# Altium PCB PCB1.PcbDoc
Units mil, origin at the board's own origin, x right, y up, seen from the top; angles counter-clockwise.
Board outline 1693.54 x 1695 mil, 2 copper layers (Top Layer, Bottom Layer); 27 components, 14 nets, 80 pads, 14 vias.
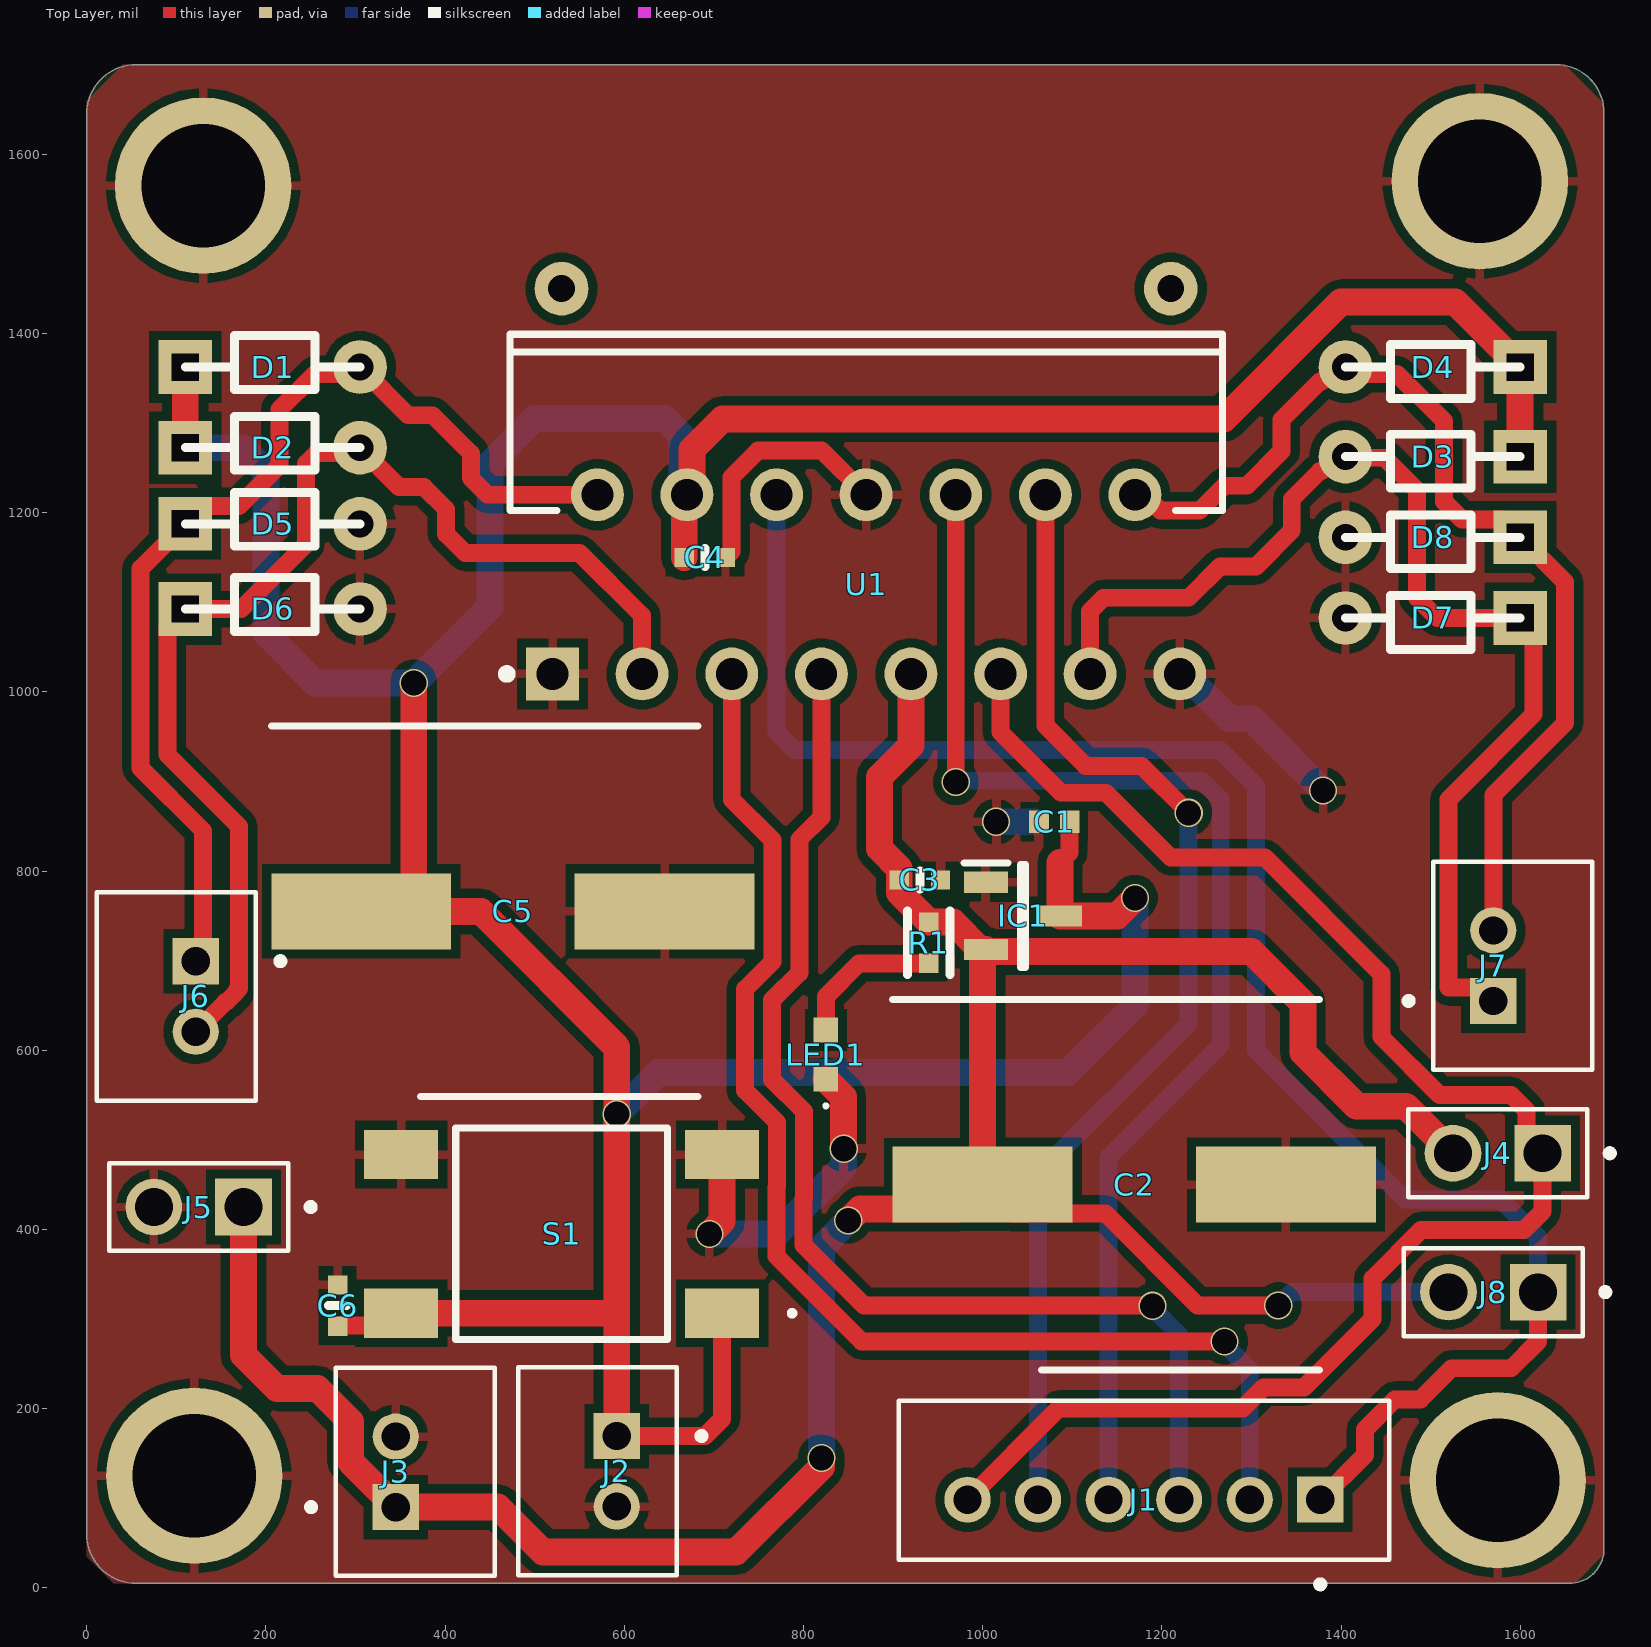
[diagram p0: Top Layer view]
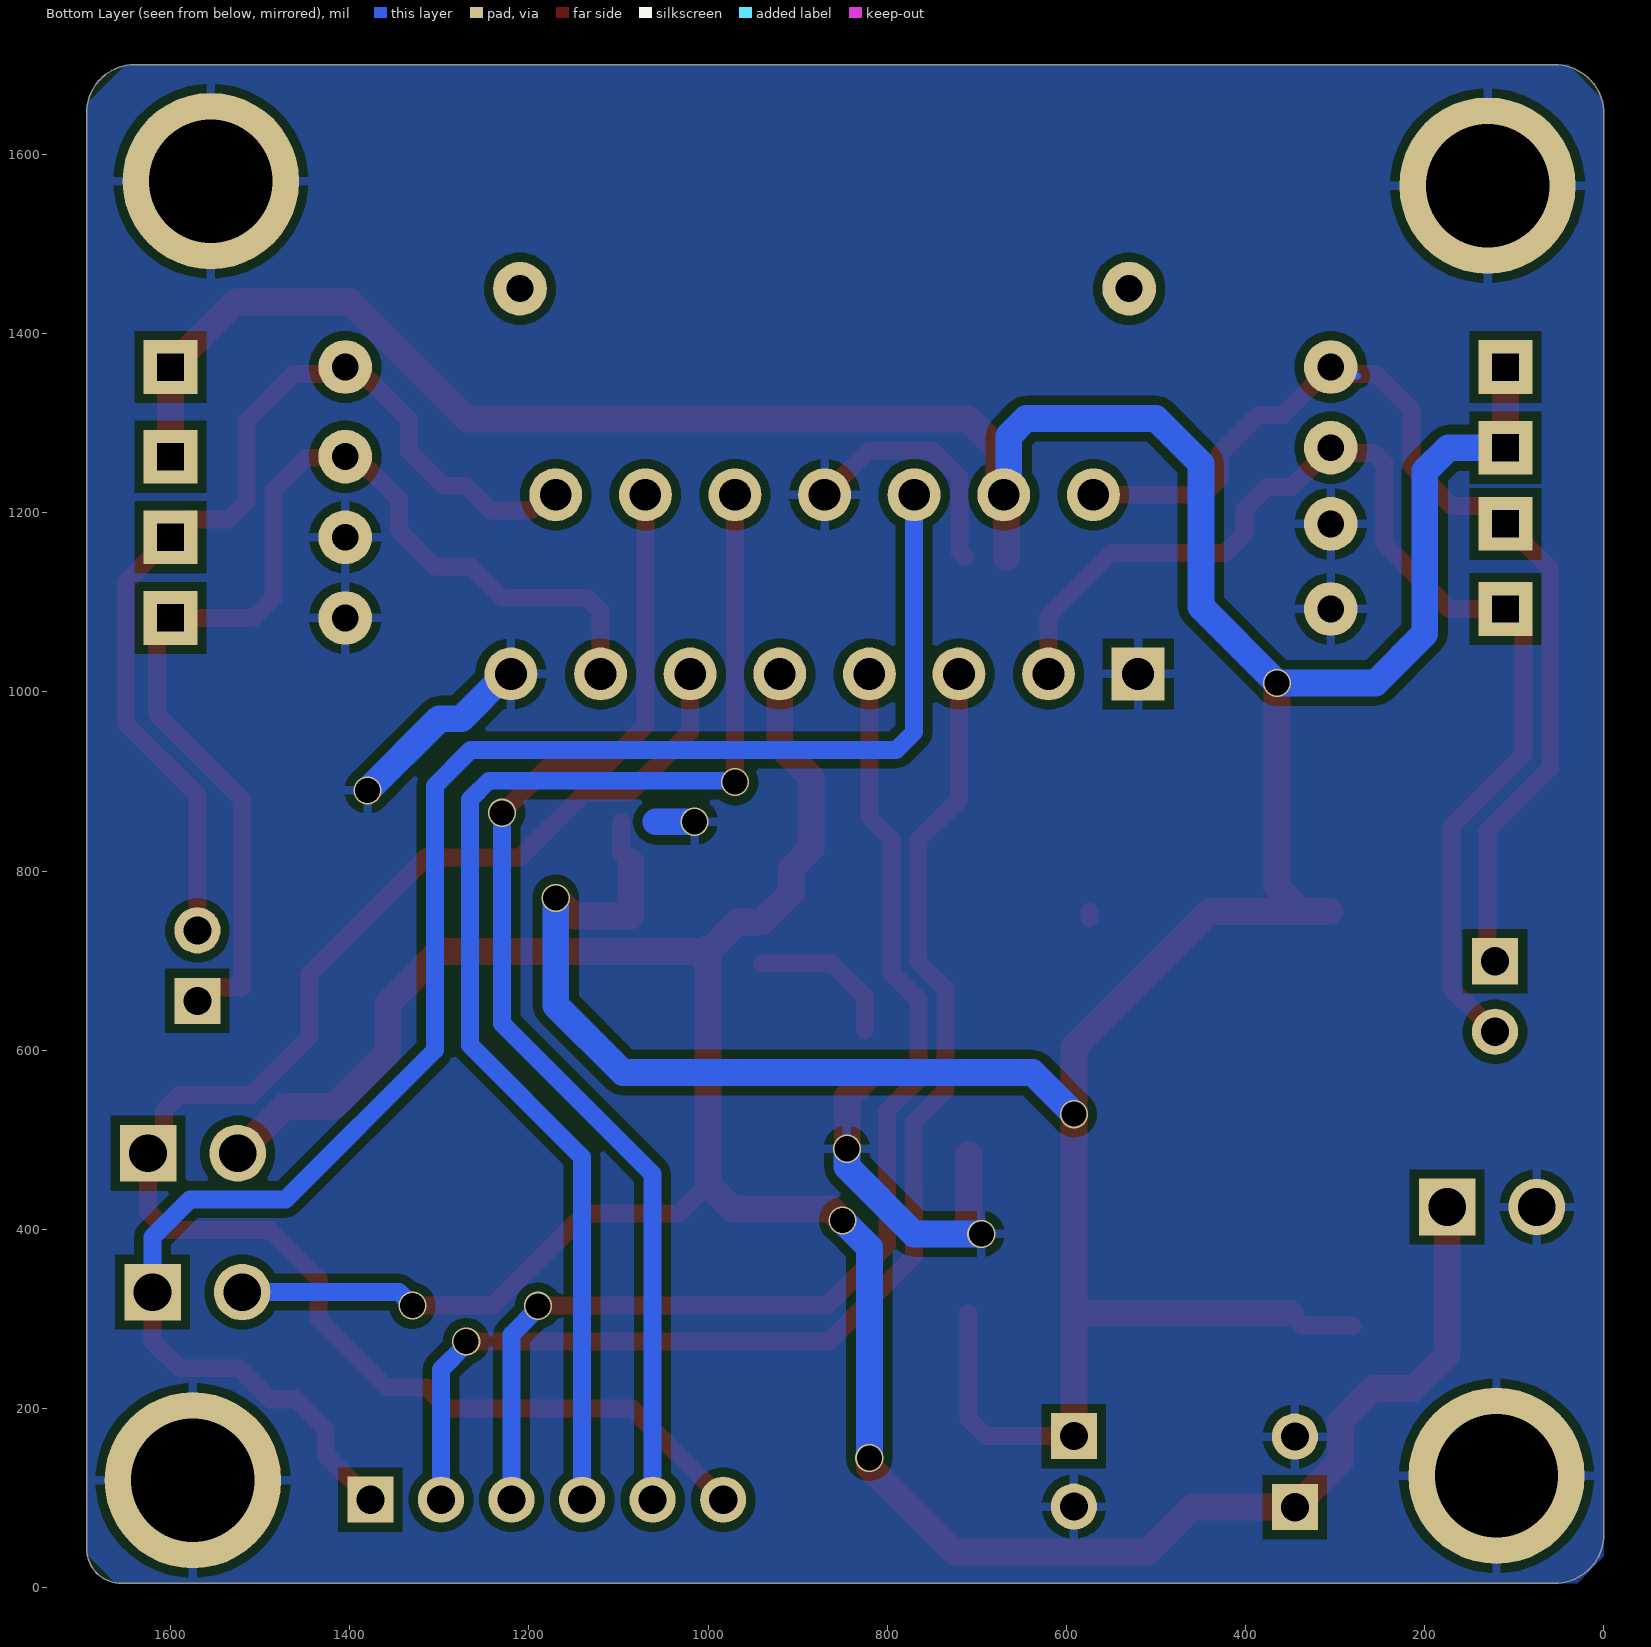
[diagram p1: Bottom Layer view, seen from below]
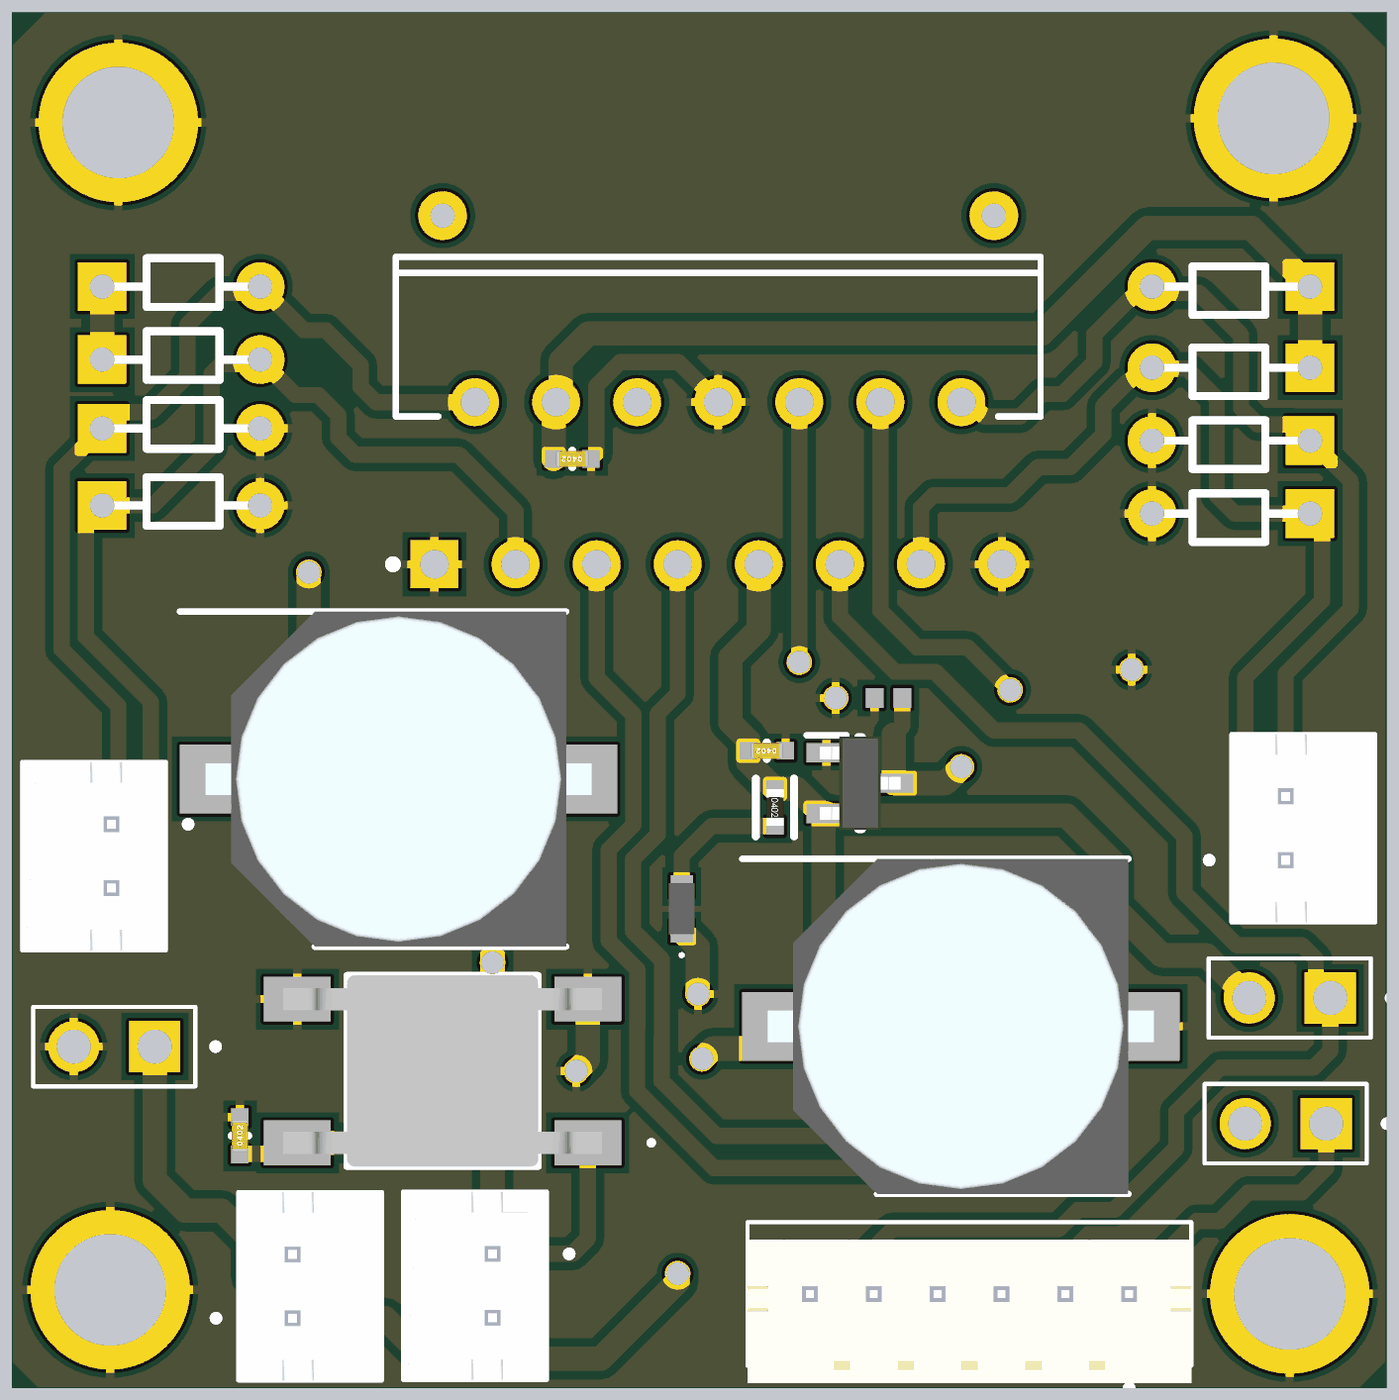
[diagram p2: 3D render of the assembled board from above, using the file's embedded part models]

## Layer stack, top to bottom
Top Solder: solder mask 0.4, Solder Resist, Dk 3.5
Top Layer: signal copper 1.4
Dielectric 1: dielectric 12.6, FR-4, Dk 4.8
Bottom Layer: signal copper 1.4
Bottom Solder: solder mask 0.4, Solder Resist, Dk 3.5

## Board outline
55,5 cw(c55,60) 0,60 0,1645 cw(c55,1645) 55,1700 1640,1700 cw(c1640,1646.46) 1693.54,1646.46 1693.54,43.54 cw(c1655,43.54) 1655,5

## Design rules (kind name [scope] priority, off if disabled: settings)
Clearance [All] p1: gap=10 ignorepadtopadclearanceinfootprint=FALSE except(0: Arc-Hole Track-Hole SMDPad-Hole THPad-Hole Via-Hole Fill-Hole Poly-Hole Region-Hole Text-Hole)
PolygonConnect [All] p1: connectstyle=Relief reliefconductorwidth=10 reliefentries=4 polygonreliefangle="90 Angle" airgapwidth=10
RoutingVias [All] p1: holewidth=28.74 width=31.5 viastyle="Through Hole" minholewidth=7.87 minwidth=19.68 maxholewidth=29.53 maxwidth=31.5
SolderMaskExpansion [All] p1: expansion=4 istentingtop=FALSE
Width [All] p1: maxlimit=100 minlimit=6 preferedwidth=10 minimp=50.000000 maximp=50.000000 favimp=50.000000
30 further rules are at their usual default settings.

## Components (designator, comment, footprint, x,y, rotation, side; value= is the part's Value field where it differs from the comment)
C1 "GRM155R61H105KE05D" CAPC1005X60N 1080,855 r0 top
C2 "MAL215099103E3" CAPAE1050X1250N 1169.29,450 r0 top
C3 "0.10µF" SMD-0402C 930,790 r90 top
C4 "0.10µF" SMD-0402C 690,1150 r90 top
C5 "MAL215099103E3" CAPAE1050X1250N 475.71,755 r0 top
C6 "0.10µF" SMD-0402C 280,315 r0 top
D1 "1N4007-E3_73" PCBComponent_1 110,1362.5 r0 top
D2 "1N4007-E3_73" PCBComponent_1 110,1272.5 r0 top
D3 "1N4007-E3_73" PCBComponent_1 1600,1262.5 r180 top
D4 "1N4007-E3_73" PCBComponent_1 1600,1362.5 r180 top
D5 "1N4007-E3_73" PCBComponent_1 110,1187.5 r0 top
D6 "1N4007-E3_73" PCBComponent_1 110,1092.5 r0 top
D7 "1N4007-E3_73" PCBComponent_1 1600,1082.5 r180 top
D8 "1N4007-E3_73" PCBComponent_1 1600,1172.5 r180 top
IC1 "MCP1799T-5002H_TT" SOT95P237X112-3N 1045,750 r0 top
J1 "B6B-PH-K" JST_B6B-PH-K 1180,120 r0 top
J2 "B2B-PH-K-S(LF)(SN)" JST_B2B-PH-K-S(LF)(SN) 570,130 r90 top
J3 "B2B-PH-K-S(LF)(SN)" JST_B2B-PH-K-S(LF)(SN) 366.65,129.37 r270 top
J4 "22-28-5027" MOLEX_22-28-5027 1575,485 r180 top
J5 "22-28-5027" MOLEX_22-28-5027 125,425 r180 top
J6 "B2B-PH-K-S(LF)(SN)" JST_B2B-PH-K-S(LF)(SN) 100,660 r90 top
J7 "B2B-PH-K-S(LF)(SN)" JST_B2B-PH-K-S(LF)(SN) 1591.65,694.37 r270 top
J8 "22-28-5027" MOLEX_22-28-5027 1570,330 r180 top
LED1 "LSM0603412V" LSM0603412V 825,595 r90 top
R1 "1k" SMD-0402-RES 940,720 r180 top
S1 "FSM2JSMAATR" FSM2J_1 530,395 r270 top
U1 "L298N" STM-FM-15 870,1120 r90 top

## Footprints (in the part's own frame and the unit in brackets; to place one, negate y for a bottom-side part, rotate by r counter-clockwise, add the part's x,y. Pads: shape width x height; smd on the part's side, far side on the other; paste and mask are expansions set on the pad)
CAPAE1050X1250N [mm]
  rect 5.1x2.15 smd: 1(-4.3,0) 2(4.3,0)
  silkscreen extent -6.85,-5.25 5.25,5.25, body extent -6.05,-5.25 6.05,5.25, height 12.5
CAPC1005X60N [mm]
  rect 0.56x0.63 smd: 1(-0.435,0) 2(0.435,0)
FSM2J_1 [mm]
  rect 1.4x2.1 smd: 1(2.25,4.55) 2(2.25,-4.55) 3(-2.25,4.55) 4(-2.25,-4.55)
  silkscreen extent -3,-3 3,6.59, body extent -3,-5 3,5, height 4.38
JST_B2B-PH-K-S(LF)(SN) [mm]
  rect 1.308x1.308 hole 0.8: 1(1,-0.55)
  round 1.308 hole 0.8: 2(-1,-0.55)
  silkscreen extent -2.95,-3.05 2.95,2.25, body extent -2.95,-2.25 2.95,2.25, height 6
JST_B6B-PH-K [mm]
  rect 1.308x1.308 hole 0.8: 1(5,-0.55)
  round 1.308 hole 0.8: 2(3,-0.55) 3(1,-0.55) 4(-1,-0.55) 5(-3,-0.55) 6(-5,-0.55)
  silkscreen extent -6.95,-3.05 6.95,2.25, body extent -6.95,-2.8 6.95,1.7, height 6
LSM0603412V [mm]
  rect 0.7x0.7 smd: 1(-0.7,0) 2(0.7,0)
  silkscreen extent -1.5,-0.05 -1.4,0.05, body extent -0.8,-0.4 0.8,0.4, height 0.75
MOLEX_22-28-5027 [mm]
  rect 1.605x1.605 hole 1.07: 01(-1.27,0)
  round 1.605 hole 1.07: 02(1.27,0)
  silkscreen extent -3.27,-1.24 2.54,1.24
PCBComponent_1 [mil]
  rect 60x60 hole 30 square: 1(0,0)
  round 60 hole 30: 2(195,0)
  silkscreen extent 0,-25 195,35
SMD-0402-RES [mm]
  rect 0.55x0.55 smd: 1(0,0.584) 2(0,-0.584)
  silkscreen extent -0.6,-0.9 0.6,0.9, body extent -0.28,-0.57 0.27,0.58, height 0.41
SMD-0402C [mm]
  rect 0.55x0.55 smd: 1(0,0.584) 2(0,-0.584)
  silkscreen extent -0.25,0 0.25,0, body extent -0.25,-0.51 0.25,0.51, height 0.51
SOT95P237X112-3N [mm]
  rect 1.25x0.6 smd: 1(-1.05,0.95) 2(-1.05,-0.95) 3(1.05,0)
  silkscreen extent -1.68,-1.46 0.08,1.5, body extent -1.27,-1.46 1.27,1.46, height 1
STM-FM-15 [mm] "FM, 15-Leads, Body 20.2x5mm, Pitch 1.27mm"
  rect 1.5x1.5 hole 0.9: 1(-2.54,8.89)
  round 1.5 hole 0.9: 2(2.54,7.62) 3(-2.54,6.35) 4(2.54,5.08) 5(-2.54,3.81) 6(2.54,2.54) 7(-2.54,1.27) 8(2.54,0) 9(-2.54,-1.27) 10(2.54,-2.54) 11(-2.54,-3.81) 12(2.54,-5.08) 13(-2.54,-6.35) 14(2.54,-7.62) 15(-2.54,-8.89)
  silkscreen extent -2.66,-10.1 7.09,10.31, body extent -2.8,-10.1 7.09,10.1, height 21

## Part data
C1: "Capacitor Ceramic Multilayer (MLCC)", Package=None, Availability=Unavailable, MF="{'manufacturer': u'Murata'}", MP=GRM155R61H105KE05D, Price=None
C2 C5: "Capacitor Polarised", Manufacturer_Name=Vishay, Mouser Part Number=594-MAL215099103E3, Arrow Part Number=MAL215099103E3, Arrow Price/Stock=https://www.arrow.com/en/products/mal215099103e3/vishay?region=nac, Datasheet Link=https://rs.componentsearchengine.com/Datasheets/1/MAL215099103E3.pdf, Height=12.5mm, Manufacturer_Part_Number=MAL215099103E3, Mouser Price/Stock=https://www.mouser.co.uk/ProductDetail/Vishay-BC-Components/MAL215099103E3?qs=9y2YoPkPyvaNNuuD%252BAyF3g%3D%3D
C3 C4 C6: library part GRM155R61H104KE14D, "CAP CER 0.1UF 50V X5R 0402", Digi-Key Part Number=490-10697-1-ND, Manufacturer="Murata Electronics North America", Operating Temperature="-55°C ~ 85°C", Package / Case="0402 (1005 Metric)", Ratings=-, Temperature Coefficient=X5R, Tolerance=±10%, Voltage=50V, @ qty=0, Applications="General Purpose", Datasheets=http://www.murata.com/~/media/webrenewal/support/library/catalog/products/capacitor/mlcc/c02e.pdf, Factory Stock=0, Features=-, Height - Seated (Max)=-, Image=//media.digikey.com/Renders/Murata%20Renders/ZRB-SERIES-0402.jpg, Lead Spacing=-, Lead Style=-, Minimum Quantity=1, Mounting Type="Surface Mount, MLCC", Packaging="Cut Tape (CT)", Part Number=GRM155R61H104KE14D, Part Status=Active, Quantity Available=329219, Series=GRM, Size / Dimension="0.039\" L x 0.020\" W (1.00mm x 0.50mm)", Thickness (Max)="0.022\" (0.55mm)", Unit Price (USD)=0.1
D1 D2 D3 D4 D5 D6 D7 D8: "Diode", Arrow Part Number=1N4007-E3/73, Manufacturer_Name=Vishay, Mouser Part Number=625-1N4007-E3/73, Arrow Price/Stock=https://www.arrow.com/en/products/1n4007-e373/vishay?region=europe, Datasheet Link=https://mouser.componentsearchengine.com/Datasheets/2/1N4007-E3_73.pdf, Manufacturer_Part_Number=1N4007-E3/73, Mouser Price/Stock=https://www.mouser.co.uk/ProductDetail/Vishay-General-Semiconductor/1N4007-E3-73?qs=N4vtoAxH%2FSqT3Ng3e4K0Gw%3D%3D
IC1: "Integrated Circuit", Arrow Part Number=MCP1799T-5002H/TT, Manufacturer_Name=Microchip, Mouser Part Number=579-CP1799T-5002H/TT, Arrow Price/Stock=https://www.arrow.com/en/products/mcp1799t-5002htt/microchip-technology?region=nac, Datasheet Link=https://eu.mouser.com/datasheet/2/268/MCP1799-Data-Sheet-20006248A-1658571.pdf, Height=1.12mm, Manufacturer_Part_Number=MCP1799T-5002H/TT, Mouser Price/Stock=https://www.mouser.co.uk/ProductDetail/Microchip-Technology/MCP1799T-5002H-TT?qs=BJlw7L4Cy7%2Fnzou%252BAWMPCQ%3D%3D
J1 J2 J3 J4 J5 J6 J7 J8: Package=None, Availability=Unavailable, Price=None
  J1: MF="{'manufacturer': u'JST Corporation'}", MP=B6B-PH-K
  J2 J3 J6 J7: MF="{'manufacturer': u'JST'}", MP=B2B-PH-K-S(LF)(SN)
  J4 J5 J8: MF="{'manufacturer': u'Molex'}", MP=22-28-5027
LED1: "LED", Manufacturer_Name="Visual Communications Company", Mouser Part Number=593-LSM0603412V, Arrow Part Number=LSM0603412V, Arrow Price/Stock=https://www.arrow.com/en/products/lsm0603412v/visual-communications?region=nac, Datasheet Link=https://vcclite.com/wp-content/uploads/wpallimport/files/files/LSM0603412V.pdf, Height=0.65mm, Manufacturer_Part_Number=LSM0603412V, Mouser Price/Stock=https://www.mouser.co.uk/ProductDetail/VCC/LSM0603412V?qs=%252BEew9%252B0nqrCIKpXilSWEhA%3D%3D
R1: library part ERJ-2GEJ102X, "RES SMD 1K OHM 5% 1/10W 0402", Digi-Key Part Number=P1.0KJCT-ND, Manufacturer="Panasonic Electronic Components", Operating Temperature="-55°C ~ 155°C", Package / Case="0402 (1005 Metric)", Power (Watts)="0.1W, 1/10W", Supplier Device Package=0402, Temperature Coefficient=±200ppm/°C, Tolerance=±5%, @ qty=1500, Composition="Thick Film", Datasheets=http://industrial.panasonic.com/www-cgi/jvcr13pz.cgi?E+PZ+3+AOA0001+ERJ2GEJ102X+7+WW, Factory Stock=0, Failure Rate=-, Features="Automotive AEC-Q200", Height - Seated (Max)="0.016\" (0.40mm)", Image=//media.digikey.com/Photos/Panasonic%20Photos/ERJ-PA2-Series.jpg, Minimum Quantity=1, Number of Terminations=2, Packaging="Cut Tape (CT)", Part Number=ERJ-2GEJ102X, Part Status=Active, Quantity Available=1939857, Series=ERJ, Size / Dimension="0.039\" L x 0.020\" W (1.00mm x 0.50mm)", Unit Price (USD)=0.00350
S1: "Switch", Manufacturer_Name="TE Connectivity", Mouser Part Number=506-FSM2JSMAATR, Arrow Part Number=FSM2JSMAATR, Arrow Price/Stock=https://www.arrow.com/en/products/fsm2jsmaatr/te-connectivity?region=nac, Datasheet Link=http://www.te.com/commerce/DocumentDelivery/DDEController?Action=showdoc&DocId=Customer+Drawing%7F2-1437565-7%7FV%7Fpdf%7FEnglish%7FENG_CD_2-1437565-7_V.pdf%7F2-1437565-9, Manufacturer_Part_Number=FSM2JSMAATR, Mouser Price/Stock=https://www.mouser.co.uk/ProductDetail/TE-Connectivity-Alcoswitch/FSM2JSMAATR?qs=g%252BEszo6zu8MKdISiZRITCQ%3D%3D
U1: library part CMP-2000-06526-1, "Dual Full-Bridge Driver, 4.8 to 46 V, -40 to 150 degC, 15-Pin FM (MW 15L), RoHS, Tube", Driver Case Style=Multiwatt, Manufacturer=STMicroelectronics, Operating Temperature Max=130°C, Operating Temperature Min=-25°C, Output Current=2A, Output Voltage=46V, Package Description="15-Pin Flange Mount, Body 5 x 19.6 mm, Pitch 1.27 mm", Package Reference=FM-15, PartNumber=L298, Supply Voltage Max=7V, Supply Voltage Min=4.5V, Automotive Qualification Standard=-, Datasheet URL=https://datasheet.ciiva.com/15109/getdatasheetpartid-50682-15109332.pdf, Datasheet Version=01/2000, Manufacturer URL=http://www.st.com/, Motor Type=FullBridge, Mounting Technology=ThroughHole, MSL=-, No. of Outputs=4Outputs, No. of Pins=15Pins, Packaging=Each, Product Range=-, SVHC=NoSVHC(17-Dec-2015)

## Free pads (board coordinates)
  round 196.85 hole 137.8: 13(120,125) 13(130,1565) 13(1555,1570) 13(1575,120)
  round 60 hole 30: 14(530,1450) 15(1210,1450)

## Via types
v1: diameter 31.5, hole 28, Top Layer to Bottom Layer, 14 vias

## Nets (pads, with @x,y where several pads share a name; then routed paths per layer and width w, separated by ;. In a path a pad name is that pad's centre, name@x,y a point inside that pad or via, vN(x,y) a via of type N, cw(c..) or ccw(c..) an arc to the next point about the centre after c; other vN are vias at no path point)
+5V: C2.1 C3.1 IC1.2 J3.1 J4.02 J5.01 J8.02 R1.2 U1.9 | length 3312.4
  Top Layer w20: C2.1 1032.32,417.68 1137.32,417.68 1240,315 v1(1330,315) ; J8.02 J8.02@1522.5,332.5 ; J4.02@1522.5,482.5 J4.02
  Top Layer w30: J5.01 175,260 212.5,222.5 257.5,222.5 294.25,185.75 294.25,140.75 J3.1 459.15,90 509.27,39.88 724.88,39.88 820,135 v1(820,145) ; v1(850,410) 850.4,410 863.08,422.68 972.68,422.68 C2.1 1000,709.41 IC1.2@1003.19,712.6 ; U1.9 920,940 885,905 885,825 907,803 907,776 R1.2 966.84,743 997.24,712.6 IC1.2@1003.19,712.6 ; J4.02 1472.5,537.5 1417.5,537.5 1357.5,597.5 1357.5,652.5 1300,710 1006.26,710 IC1.2 IC1.2@1003.19,712.6
  Bottom Layer w20: v1(1330,315) 1345,330 J8.02
  Bottom Layer w30: v1(820,145) 820,380 v1(850,410)
+12V: C1.2 C4.1 C5.1 C6.2 D1.1 D2.1 D3.1 D4.1 IC1.3 J2.1 S1.1 S1.2 U1.4 | length 4959.9
  Top Layer w20: C6.2 280.83,292.83 337.28,292.83 S1.2 ; J2.1 690.08,169.37 709.13,188.43 S1.1 ; 1086.34,809.68 1097.13,820.47 C1.2
  Top Layer w30: D2.1 D1.1 ; C5.1 C5.1@337.68,755 ; S1.2 585.24,306.42 591.65,300 ; v1(365,1010) 365,782.32 C5.1@337.68,755 ; J2.1 591.65,300 ; C4.1 667,1217 U1.4 675.56,1225.56 675.56,1270.56 709.53,1304.53 1269.25,1304.53 1399.72,1435 1527.5,1435 D4.1 D3.1 ; 1086.34,809.68 IC1.3 1150,750 v1(1170,770) ; C5.1@337.68,755 440,755 591.65,603.35 v1(591.65,528.62) 591.65,300
  Bottom Layer w30: D2.1 173.7,1272.5 200,1246.2 200,1065 255,1010 v1(365,1010) 450,1095 450,1255 500,1305 645,1305 664.44,1285.56 664.44,1225.56 U1.4 ; v1(591.65,528.62) 638.03,575 1095,575 1170,650 v1(1170,770)
EN-A: J1.1 J8.01 U1.6 | length 1970.8
  Top Layer w20: J1.1 1426.75,148.25 1426.75,176.75 1460,210 1488.5,210 1523.5,245 1590,245 1620,275 J8.01
  Bottom Layer w20: U1.6 770,955 790,935 1265,935 1305,895 1305,600 1471.59,433.41 1578.19,433.41 1620,391.59 J8.01
EN-B: J1.6 J4.01 U1.11 | length 1789.7
  Top Layer w20: J1.6 1084.8,200 1290,200 1313.62,223.62 1358.62,223.62 1435,300 1435,345 1489.2,399.2 1604.2,399.2 1625,420 J4.01 1607.19,502.81 1607.19,532.81 1590,550 1510,550 1445,615 1445,685 1315,815 1210,815 1137.6,887.4 1087.6,887.4 1020,955 U1.11
GND: C1.1 C2.2 C3.2 C4.2 C5.2 C6.1 D5.2 D6.2 D7.2 D8.2 IC1.1 J2.2 J3.2 J5.02 LED1.1 pad.13 S1.3 S1.4 U1.1 U1.8 U1.15 | length 921.5
  Top Layer w20: C5.2@574.13,747.63 C5.2@574.13,755 ; C4.2 719.53,1156.53 719.53,1239.57 749.48,1269.53 820.47,1269.53 U1.8
  Top Layer w30: v1(695,395) 709.13,409.13 S1.3 ; LED1.1 844.71,547.73 844.71,490.29 v1(845,490)
  Bottom Layer w30: v1(695,395) 770,395 845,470 v1(845,490) ; v1(1015,855) 1058.35,855 ; U1.15 1225.4,1020 1275.4,970 1300,970 v1(1380,890)
INPUT1: J1.2 U1.5 | length 1423.9
  Top Layer w20: U1.5 720,880 765.39,834.61 765.39,698.79 735,668.39 735,555 770.47,519.53 770.47,447.74 770,447.27 770,370 865,275 v1(1270,275)
  Bottom Layer w20: v1(1270,275) 1270,271.89 1298.11,243.78 J1.2
INPUT2: J1.3 U1.7 | length 1321.7
  Top Layer w20: U1.7 820,860 795.39,835.39 795.39,686.36 765,655.97 765,567.43 800,532.43 800,532.32 800.47,531.85 800.47,435.31 800,434.84 800,382.43 867.43,315 1189.44,315 v1(1189.72,314.72)
  Bottom Layer w20: v1(1189.72,314.72) 1189.72,312.17 1219.37,282.52 J1.3
INPUT3: J1.4 U1.10 | length 1459.1
  Top Layer w20: v1(970,899.25) U1.10
  Bottom Layer w20: v1(970,899.25) 971.5,900.75 1244.81,900.75 1265.75,879.81 1265.75,605.75 1140.63,480.63 J1.4
INPUT4: J1.5 U1.12 | length 1294.2
  Top Layer w20: U1.12 1070,962.43 1115.02,917.4 1177.6,917.4 v1(1230,865)
  Bottom Layer w20: J1.5 1061.89,461.89 1230,630 v1(1230,865)
NetLED1_2: LED1.2 R1.1 | length 167.8
  Top Layer w20: LED1.2 825,660 862,697 R1.1
OUTPUT1: D1.2 D5.1 J6.1 U1.2 | length 1219.6
  Top Layer w20: J6.1 130,707.72 130,845 60,915 60,1137.5 D5.1 130,1207.5 170,1207.5 215,1252.5 215,1315 254.85,1354.85 297.35,1354.85 D1.2 358.75,1308.75 386.25,1308.75 428.75,1266.25 428.75,1238.75 447.5,1220 U1.2
  Bottom Layer w8: 275.05,1352.55 295.05,1352.55 D1.2
OUTPUT2: D2.2 D6.1 J6.2 U1.3 | length 1359.1
  Top Layer w20: J6.2 154.65,653.62 155.69,653.62 167.4,665.34 167.4,666.38 170,668.98 170,850 90,930 90,1072.5 D6.1 172.5,1092.5 245,1165 245,1255 256.72,1266.72 299.22,1266.72 D2.2 348.75,1228.75 376.25,1228.75 401.25,1203.75 401.25,1176.25 422.5,1155 550,1155 620,1085 U1.3
  Bottom Layer w8: D2.2@280.05,1262.55 295.05,1262.55 D2.2
OUTPUT3: D3.2 D7.1 J7.1 U1.13 | length 1301.1
  Top Layer w20: U1.13 1120,1090 1135,1105 1230,1105 1265,1140 1305,1140 1345,1180 1345,1215 1376.32,1246.32 1378,1246.32 1394.18,1262.5 D3.2 1406.18,1261.32 1448.68,1261.32 1485,1225 1485,1105 1507.5,1082.5 D7.1 1615,1067.5 1615,975 1520,880 1520,670 1555,670 J7.1
OUTPUT4: D4.2 D8.1 J7.2 U1.14 | length 1148.2
  Top Layer w20: U1.14 1180.57,1220 1198.28,1202.28 1242.28,1202.28 1270,1230 1295,1230 1333.75,1268.75 1333.75,1303.75 1376.32,1346.32 1378,1346.32 1394.18,1362.5 D4.2 1412.65,1354.85 1462.65,1354.85 1515,1302.5 1515,1212.5 1535,1192.5 1580,1192.5 D8.1 1650,1122.5 1650,965 1570,885 J7.2

## Polygon pours and split planes (outlines as drawn)
GND on Top Layer "GND_L01_P001" (solid, pour order 1): 1661.31,5 1692.91,36.6 1692.91,1657.09 1650,1700 40,1700 0,1660 0,35 30,5
GND on Bottom Layer "GND_L02_P002" (solid, pour order 2): 30,5 1661.31,5 1692.91,36.6 1692.91,1657.09 1650,1700 40,1700 0,1660 0,35

## Silkscreen, mask and mechanical layers (free items; w line width, h text height)
Mechanical 1:
  the board outline again, w30